# Altium PCB Drone_V2.PcbDoc
Units mm, origin at the board's own origin, x right, y up, seen from the top; angles counter-clockwise.
Board outline 72 x 72 mm, 2 copper layers (Top Layer, Bottom Layer); 31 components, 23 nets, 117 pads, 0 vias.
Unrouted connection lines stored in the file: 66.
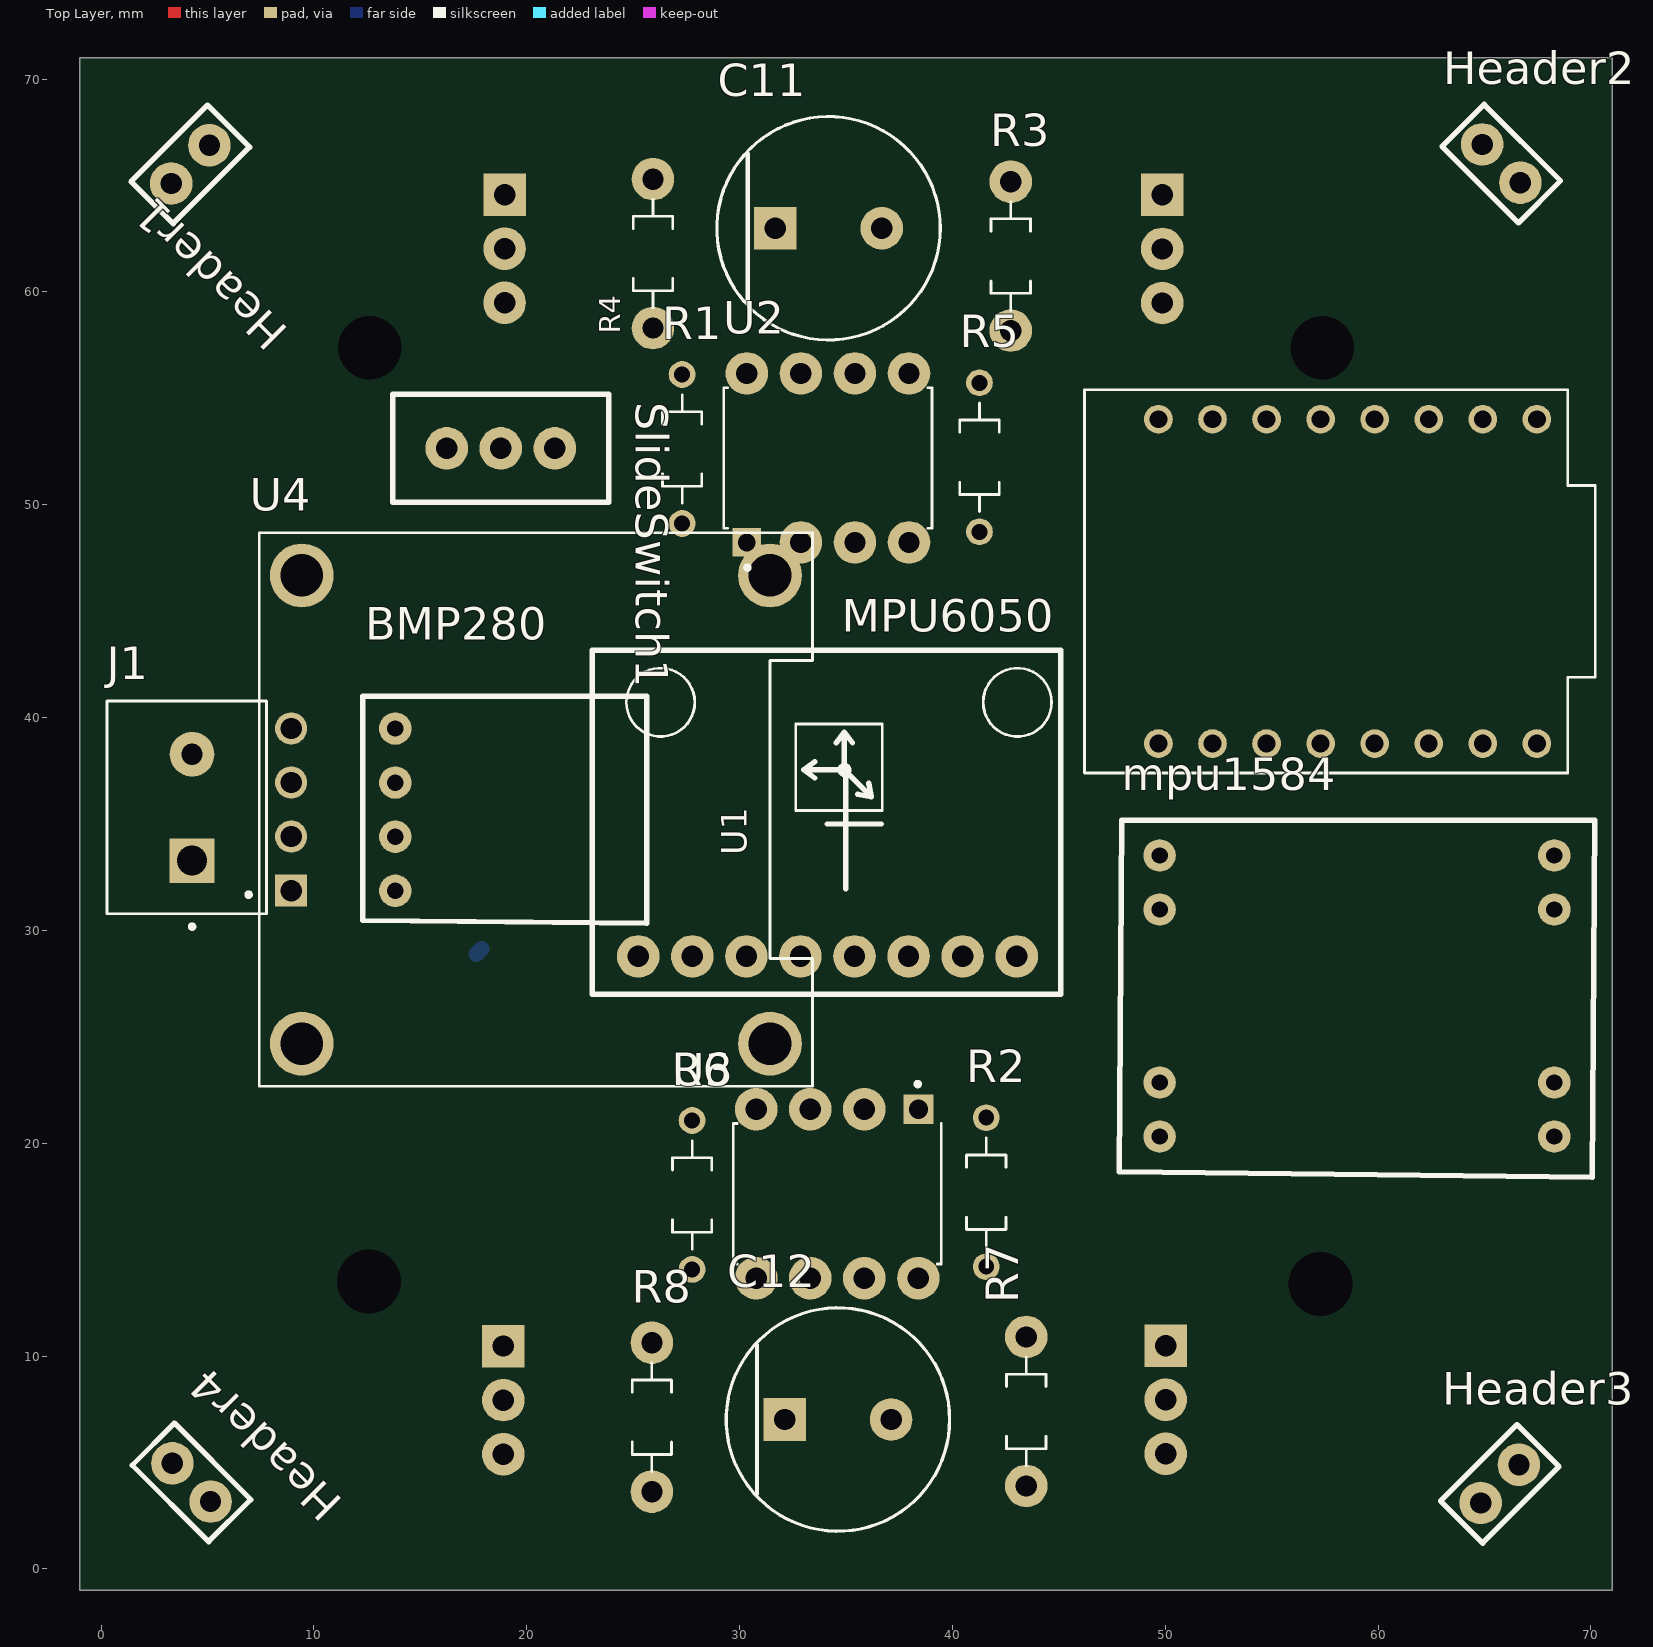
[diagram p0: Top Layer view]
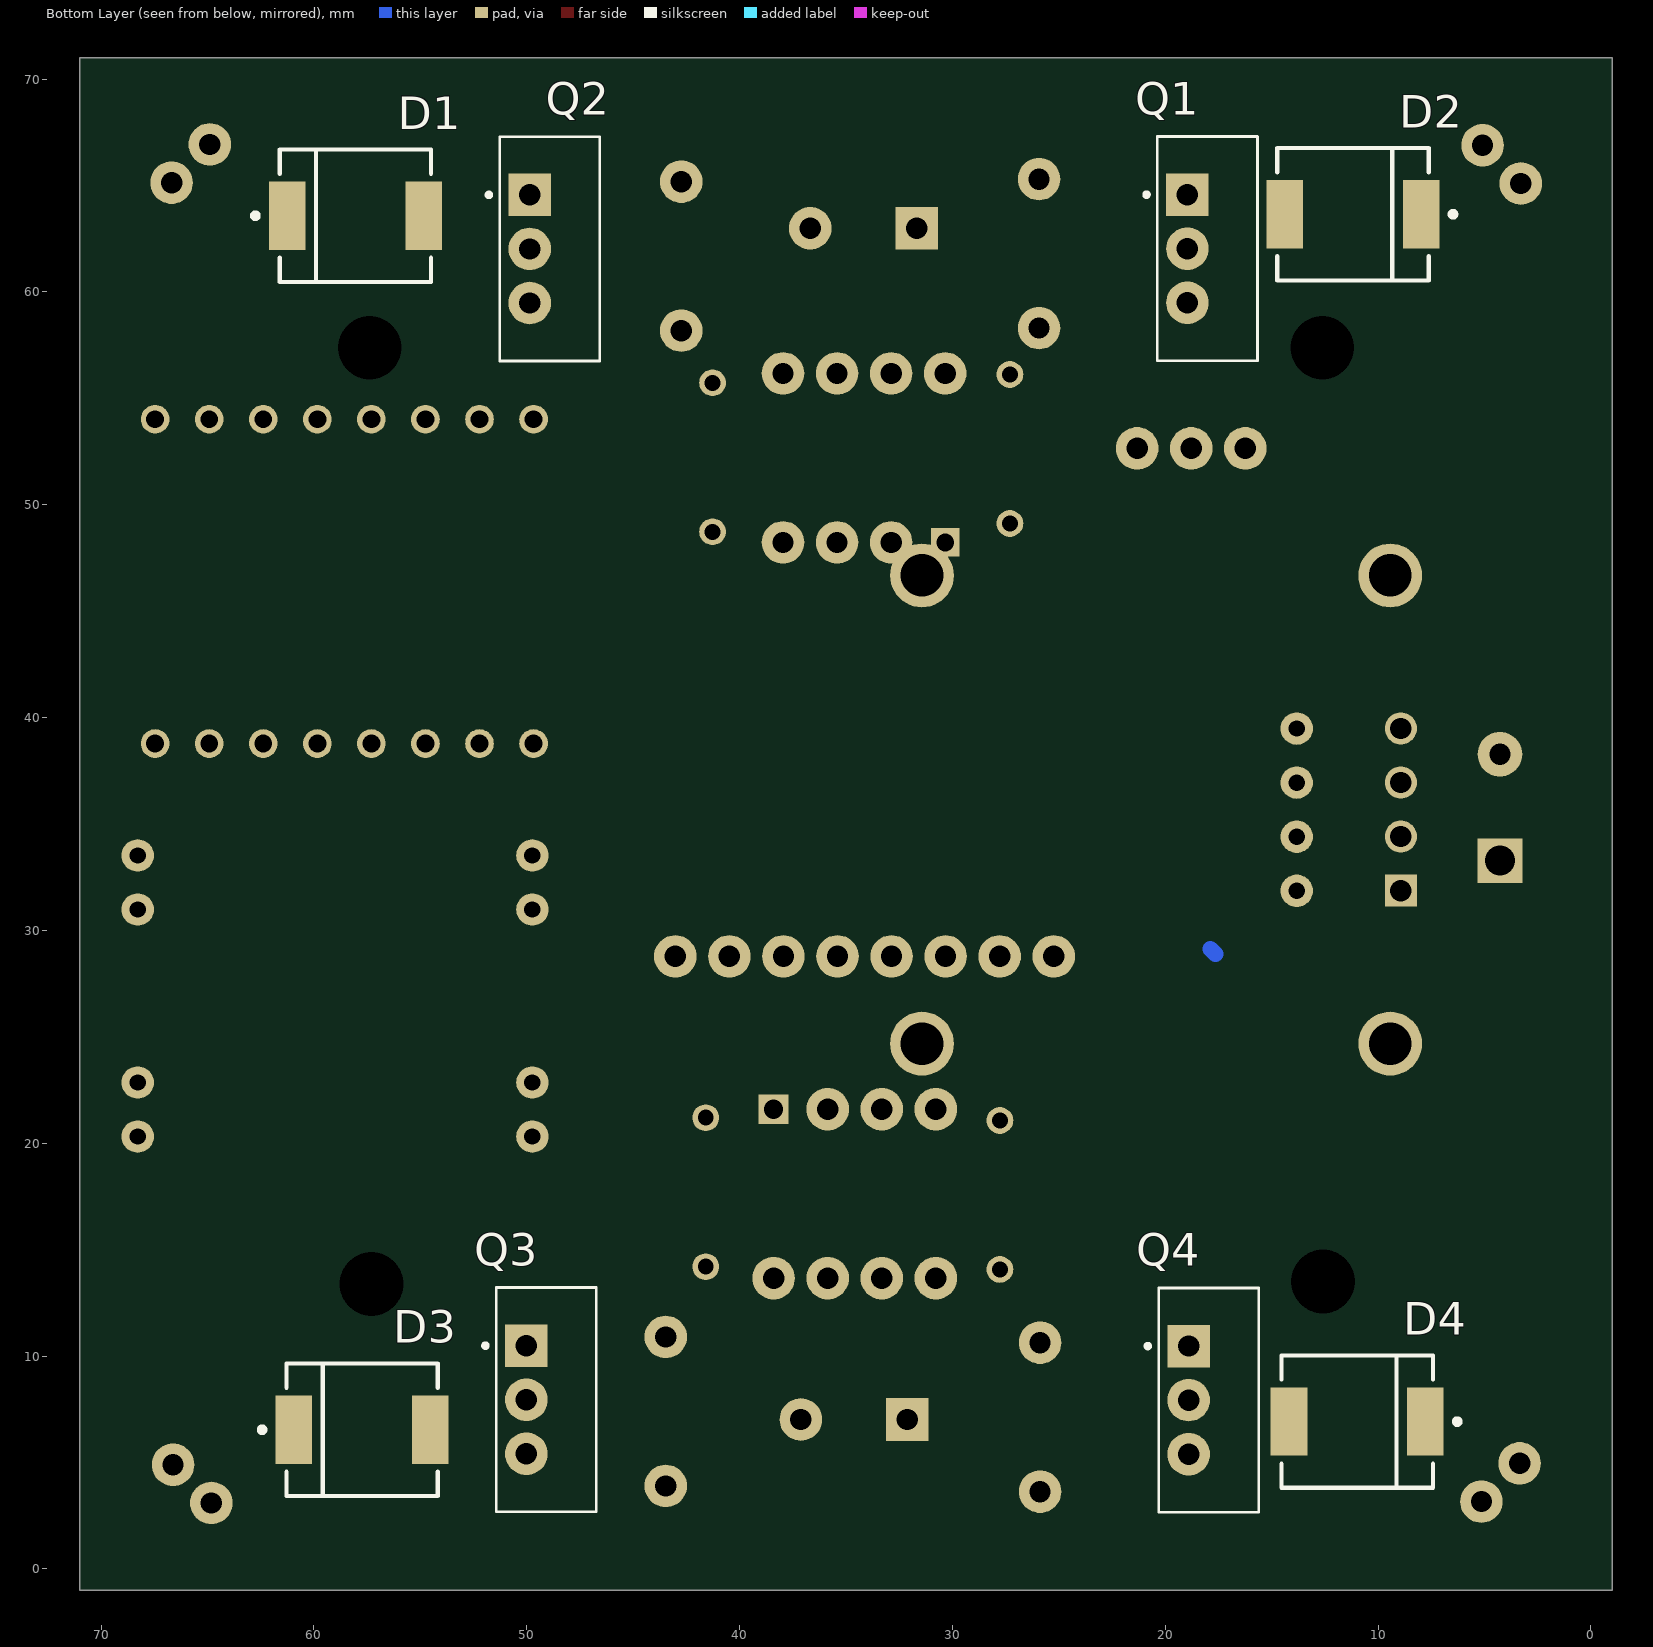
[diagram p1: Bottom Layer view, seen from below]

## Layer stack, top to bottom
Top Solder: solder mask 0.0102, Solder Resist, Dk 3.5
Top Layer: signal copper 0.0356
Dielectric 1: dielectric 0.32, FR-4, Dk 4.8
Bottom Layer: signal copper 0.0356
Bottom Solder: solder mask 0.0102, Solder Resist, Dk 3.5

## Board outline
-1,-1 -1,71 71,71 71,-1

## Design rules (kind name [scope] priority, off if disabled: settings)
BoardOutlineClearance [IsPolygon] p1: gap=0.5 ignorepadtopadclearanceinfootprint=FALSE
Clearance Clearance_1 [InPolygon] p1: gap=1.5 ignorepadtopadclearanceinfootprint=FALSE
Clearance [All] p2: gap=0.5 ignorepadtopadclearanceinfootprint=FALSE
PolygonConnect [All] p1: connectstyle=Relief reliefconductorwidth=0.254 reliefentries=4 polygonreliefangle="90 Angle" airgapwidth=0.254
RoutingLayers [All] p1: top layer_v5=FALSE bottom layer_v5=TRUE
RoutingVias [All] p1: holewidth=0.711 width=1.27 viastyle="Through Hole" minholewidth=0.711 minwidth=1.27 maxholewidth=0.711 maxwidth=1.27
SolderMaskExpansion [All] p1: expansion=0.102 istentingtop=FALSE
SupplyNets "Schematic Supply Nets_2" [InNet('+5')] p1: voltage=0.000
SupplyNets "Schematic Supply Nets_3" [InNet('VCC')] p2: voltage=0.000
SupplyNets "Schematic Supply Nets_1" [InNet('GND')] p3: voltage=0.000
SupplyNets "Schematic Supply Nets" [InNet('+3.3V')] p4: voltage=0.000
Width Width_Power [InNet('VCC') or InNet('NetD4_2') or InNet('NetD1_2') or InNet('NetD3_2') or InNet('NetD2_2')] p1: maxlimit=2 minlimit=0.75 preferedwidth=2
Width Width_GND [InNet('GND')] p2: maxlimit=1.5 minlimit=0.75 preferedwidth=1.5
Width Width_1 [All] p3: maxlimit=0.75 minlimit=0.75 preferedwidth=0.75
29 further rules are at their usual default settings.

## Components (designator, comment, footprint, x,y, rotation, side; value= is the part's Value field where it differs from the comment)
BMP280 "Component_1" PCBComponent_1#1 14.33,36.18 r0 top
C11 "25SEK470M" FP-OS-CON-TH-F13-d_0_6-MFG 34.18,62.99 r0 top
C12 "25SEK470M" FP-OS-CON-TH-F13-d_0_6-MFG 34.62,7.02 r0 top
D1 "SS34-E3/57T" FP-95402-MFG 58.05,63.58 r180 bottom
D2 "SS34-E3/57T" FP-95402-MFG 11.18,63.65 r0 bottom
D3 "SS34-E3/57T" FP-95402-MFG 57.735,6.54 r180 bottom
D4 "SS34-E3/57T" FP-95402-MFG 10.98,6.92 r0 bottom
Header1 "Component_1" 1X2P 5.719,67.339 r135 top
Header2 "Component_1" 1X2P 64.441,67.559 r225 top
Header3 "Component_1" 1X2P 64.191,2.651 r315 top
Header4 "Component_1" 1X2P 5.595,2.535 r45 top
J1 "KF301-2P" HANDSON_KF301-2P 4.275,35.78 r90 top
mpu1584 "Component_1" PCBComponent_1#2 52.15,30.22 r0 top
MPU6050 "GY-521" *GY-521_GY-521(Primary) 45.084,27.01 r90 top
Q1 "IRLZ44N" TO254P1054X469X1930-3 18.02,62.031 r270 bottom
Q2 "IRLZ44N" TO254P1054X469X1930-3 48.92,62.02 r270 bottom
Q3 "IRLZ44N" TO254P1054X469X1930-3 49.08,7.95 r270 bottom
Q4 "IRLZ44N" TO254P1054X469X1930-3 17.96,7.93 r270 bottom
R1 "3-1623927-1" RESAD700W45L350D185#1 27.3,52.62 r90 top
R2 "3-1623927-1" RESAD700W45L350D185#1 41.59,17.7 r90 top
R3 "3-1623927-1" RESAD700W45L350D185#2 42.74,61.681 r270 top
R4 "3-1623927-1" RESAD700W45L350D185#2 25.93,61.8 r90 top
R5 "3-1623927-1" RESAD700W45L350D185#1 41.27,52.23 r90 top
R6 "3-1623927-1" RESAD700W45L350D185#1 27.77,17.57 r90 top
R7 "3-1623927-1" RESAD700W45L350D185#2 43.47,7.4 r270 top
R8 "3-1623927-1" RESAD700W45L350D185#2 25.88,7.13 r270 top
SlideSwitch1 "SlideSwitch" PCBComponent_1#3 13.7,55.19 r270 top
U1 "ESP32-C3_SUPERMINI_TH" MODULE_ESP32-C3_SUPERMINI_TH 57.56,46.4 r270 top
U2 "TC4427CPA" DIP794W46P254L978H432Q8#1 34.15,52.2 r90 top
U3 "TC4427CPA" DIP794W46P254L978H432Q8#2 34.59,17.63 r270 top
U4 "DM-OLED096-636" MODULE_DM-OLED096-636 20.43,35.68 r90 top

## Footprints (in the part's own frame and the unit in brackets; to place one, negate y for a bottom-side part, rotate by r counter-clockwise, add the part's x,y. Pads: shape width x height; smd on the part's side, far side on the other; paste and mask are expansions set on the pad)
1X2P [mm]
  round 2 hole 1: 1(0.127,3.302) 2(0.127,0.762)
  silkscreen extent -1.27,-0.51 1.52,4.57
*GY-521_GY-521(Primary) [mm]
  round 2 hole 1: AD0(1.77,4.604) GND(1.77,17.304) INT(1.77,2.064) SCL(1.77,14.764) SDA(1.77,12.224) VCC(1.77,19.844) XCL(1.77,7.144) XDA(1.77,9.684)
  silkscreen extent 0,0 16.15,22, body extent 0.28,0.81 15.98,21.11, height 3
DIP794W46P254L978H432Q8#1 [mm]
  rect 1.338x1.338 / inner round 1.338 / far side rect 1.338x1.338 hole 0.83: 1(-3.97,3.81)
  round 2 hole 1: 2(-3.97,1.27) 3(-3.97,-1.27) 4(-3.97,-3.81) 5(3.97,-3.81) 6(3.97,-1.27) 7(3.97,1.27) 8(3.97,3.81)
  silkscreen extent -5.25,-4.89 3.3,4.89, body extent -4.19,-4.89 4.19,4.89, height 4.32
DIP794W46P254L978H432Q8#2 [mm]
  rect 1.4x1.4 hole 0.9: 1(-3.97,3.81)
  round 2 hole 1: 2(-3.97,1.27) 3(-3.97,-1.27) 4(-3.97,-3.81) 5(3.97,-3.81) 6(3.97,-1.27) 7(3.97,1.27) 8(3.97,3.81)
  silkscreen extent -5.25,-4.89 3.3,4.89, body extent -4.19,-4.89 4.19,4.89, height 4.32
FP-95402-MFG [mm]
  rect 1.72x3.2 smd paste+0: 1(-3.205,0) 2(3.205,0)
  silkscreen extent -4.83,-3.11 3.56,3.11, body extent -3.97,-2.95 3.97,2.95, height 2.62
FP-OS-CON-TH-F13-d_0_6-MFG [mm]
  rect 2x2 hole 1 paste-2539.97: 1(-2.5,0)
  round 2 hole 1 paste-2539.97 mask+0: 2(2.5,0)
  silkscreen extent -5.25,-5.25 5.25,5.25, body extent -5.35,-5.35 5.35,5.35, height 0.25
HANDSON_KF301-2P [mm]
  rect 2.1x2.1 hole 1.4: 1(-2.5,0)
  round 2.1 hole 1: 2(2.5,0)
  silkscreen extent -5.7,-3.5 5,4, body extent -5.6,-3.75 5,3.75, height 10
MODULE_DM-OLED096-636 [mm]
  rect 1.508x1.508 / inner round 1.508 / far side rect 1.508x1.508 hole 1: 1(-3.81,11.5)
  round 1.508 hole 1: 2(-1.27,11.5) 3(1.27,11.5) 4(3.81,11.5)
  round 3 hole 2: S1(-11,11) S2(11,11) S3(11,-11) S4(-11,-11)
  silkscreen extent -13,-13 13,13.6, body extent -13,-13 13,13, height 5.66
MODULE_ESP32-C3_SUPERMINI_TH [mm]
  round 1.348 hole 0.84: 0(7.62,-7.88) 1(7.62,-5.34) 2(7.62,-2.8) 3(7.62,-0.26) 3.3(7.62,4.82) 4(7.62,2.28) 5(-7.62,9.9) 5V(7.62,9.9) 6(-7.62,7.36) 7(-7.62,4.82) 8(-7.62,2.28) 9(-7.62,-0.26) 10(-7.62,-2.8) 20(-7.62,-5.34) 21(-7.62,-7.88) G(7.62,7.36)
  silkscreen extent -9,-11.35 9,12.65, body extent -9,-11.35 9,12.65, height 4.16
PCBComponent_1#1 [mil]
  round 60 hole 30: 1(-20,130) 2(-20,30) 3(-20,-70) 4(-20,-170)
  silkscreen extent -80,-230 445,190
PCBComponent_1#2 [mil]
  round 60 hole 30: 1(-95,130) 2(-95,30) 3(-95,-290) 4(-95,-390) 5(635,130) 6(635,30) 7(635,-290) 8(635,-390)
  silkscreen extent -170,-465 710,195
PCBComponent_1#3 [mil]
  round 78.74 hole 39.37: 0(100,300) 1(100,200) 2(100,100)
  silkscreen extent 0,0 200,400
RESAD700W45L350D185#1 [mm]
  round 1.258 hole 0.75: 1(-3.5,0) 2(3.5,0)
  silkscreen extent -2.55,-0.92 2.55,0.92, body extent -3.72,-0.92 3.72,0.92, height 1.84
RESAD700W45L350D185#2 [mm]
  round 2 hole 1: 1(-3.5,0) 2(3.5,0)
  silkscreen extent -2.55,-0.93 2.55,0.93, body extent -3.72,-0.92 3.72,0.92, height 1.84
TO254P1054X469X1930-3 [mm]
  rect 2x2 hole 1: 1(-2.54,-0.94)
  round 2 hole 1: 2(0,-0.94) 3(2.54,-0.94)
  silkscreen extent -5.27,-2.96 5.27,2.35, body extent -5.03,-3.66 5.13,0.79, height 10.39

## Part data
C11 C12: library part CMP-05428-000411-1, "Conductive Polymer Aluminum Solid Capacitors (OS-CON) 470uF ±20% 25V RADIAL TH 10x13mm", RoHS Compliant=Yes
D1 D2 D3 D4: library part CMP-02539-000012-1, "DIODE SCHOTTKY 40V 3A DO214AB", Forward Current=3A, Manufacturer=Vishay, Max Junction Temp=+150°C, Max Repetitive Reverse Voltage=40V, Max Surge Forward Current=100A, Package=95402, Peak Reverse Current=0.5mA, Temperature="-55°C to +150°C", Temperature Range Low=-55°C, Automotive=No, Category=Diode, ComponentLink2Description=Datasheet, ComponentLink2URL=http://www.vishay.com/docs/88751/ss32.pdf, Device Class L1="Discrete Semiconductors", Device Class L2=Diodes, Device Class L3="Schottky Diodes", Digikey Description="DIODE SCHOTTKY 40V 3A DO214AB", Footprint Url=http://www.vishay.com/docs/95402/smc.pdf, Height=2.62mm, Lead Free=Yes, Manufacturer Part Number=SS34-E3/57T, Mouser Description="Schottky Diodes & Rectifiers 3.0 Amp 40 Volt", Octopart=https://octopart.com/ss34-e3%2F57t-vishay-39552907, RoHS=TRUE, Standoff Height=0mm, Temperature Range High=+150°C
J1: "2 Pin Terminal Block 5mm Pitch", Package=None, Check_prices=https://www.snapeda.com/parts/KF301-2P/Handson+Technology/view-part/?ref=eda, MF="Handson Technology", MP=KF301-2P, SnapEDA_Link=https://www.snapeda.com/parts/KF301-2P/Handson+Technology/view-part/?ref=snap
MPU6050: "Triple Axis Accelerometer Gyro Breakout", Package=Package, Check_prices=https://www.snapeda.com/parts/GY-521/GODREAM+FORDREAM+CO.%252C+LIMITED/view-part/?ref=eda, MF="GODREAM FORDREAM CO., LIMITED", MP=GY-521, SnapEDA_Link=https://www.snapeda.com/parts/GY-521/GODREAM+FORDREAM+CO.%252C+LIMITED/view-part/?ref=snap
Q1 Q2 Q3 Q4: "N-Channel 55 V 47A (Tc) 3.8W (Ta), 110W (Tc) Surface Mount D2PAK", Package="TO-220-3 Infineon / IR", Availability="Not in stock", Check_prices=https://www.snapeda.com/parts/IRLZ44N/Infineon/view-part/?ref=eda, MF="Infineon / IR", MP=IRLZ44N, Price=None, SnapEDA_Link=https://www.snapeda.com/parts/IRLZ44N/Infineon/view-part/?ref=snap
R1 R2 R3 R4 R5 R6 R7 R8: "1 MOhms Â±5% 0.25W, 1/4W Through Hole Resistor Axial - Carbon Film", Package=None, Check_prices=https://www.snapeda.com/parts/3-1623927-1/TE+Connectivity/view-part/?ref=eda, MF="TE Connectivity", MP=3-1623927-1, SnapEDA_Link=https://www.snapeda.com/parts/3-1623927-1/TE+Connectivity/view-part/?ref=snap
U1: "Super tiny ESP32-C3 board", Package=Package, Check_prices=https://www.snapeda.com/parts/ESP32-C3%20SuperMini_TH/Espressif+Systems/view-part/?ref=eda, MF="Espressif Systems", MP="ESP32-C3 SuperMini_TH", SnapEDA_Link=https://www.snapeda.com/parts/ESP32-C3%20SuperMini_TH/Espressif+Systems/view-part/?ref=snap
U2 U3: "TC4427CPA,Dual MOSFET Power Driver 1.5A,4.5 to 18V,Non-Inverting,8-Pin PDIP", Package="DIP-8 Microchip", Check_prices=https://www.snapeda.com/parts/TC4427CPA/Microchip+Technology/view-part/?ref=eda, MF="Microchip Technology", MP=TC4427CPA, SnapEDA_Link=https://www.snapeda.com/parts/TC4427CPA/Microchip+Technology/view-part/?ref=snap
U4: "0.96â€ 128 X 64 MONOCHROME GRAPHIC OLED DISPLAY MODULE - I2C", Package=Package, Check_prices=https://www.snapeda.com/parts/DM-OLED096-636/Display+Module/view-part/?ref=eda, MF="Display Module", MP=DM-OLED096-636, SnapEDA_Link=https://www.snapeda.com/parts/DM-OLED096-636/Display+Module/view-part/?ref=snap

## Free pads (board coordinates)
  round 0 hole 3: 42(12.62,57.38) 46(57.38,57.38) 47(57.3,13.38) 48(12.58,13.5)

## Nets (pads, with @x,y where several pads share a name; then routed paths per layer and width w, separated by ;. In a path a pad name is that pad's centre, name@x,y a point inside that pad or via, vN(x,y) a via of type N, cw(c..) or ccw(c..) an arc to the next point about the centre after c; other vN are vias at no path point)
+3.3V: BMP280.1 MPU6050.VCC U1.3.3 U4.2
+5: SlideSwitch1.0 U1.5V
A0: R1.2 U1.0 U2.2
A1: R2.1 U1.1 U2.4
A2: R5.2 U1.4 U3.4
A3: R6.1 U1.5 U3.2
GND: BMP280.2 C11.1 C12.1 J1.2 mpu1584.1 mpu1584.5 MPU6050.GND Q1.3 Q2.3 Q3.3 Q4.3 R1.1 R2.2 R5.1 R6.2 U1.G U2.3 U3.3 U4.1
NetD1_2: D1.2 Header2.2 Q2.2
NetD2_2: D2.2 Header1.2 Q1.2
NetD3_2: D3.2 Header3.2 Q3.2
NetD4_2: D4.2 Header4.2 Q4.2
Netmpu1584_4: mpu1584.4 SlideSwitch1.1
NetQ1_1: Q1.1 R4.1
NetQ2_1: Q2.1 R3.1
NetQ3_1: Q3.1 R7.1
NetQ4_1: Q4.1 R8.1
Q1: R4.2 U2.7
Q2: R3.2 U2.5
Q3: R8.2 U3.5
Q4: R7.2 U3.7
SCL: BMP280.3 MPU6050.SCL U1.2 U4.3
SDA: BMP280.4 MPU6050.SDA U1.3 U4.4
VCC: C11.2 C12.2 D1.1 D2.1 D3.1 D4.1 Header1.1 Header2.1 Header3.1 Header4.1 J1.1 mpu1584.8 U2.6 U3.6
pads on no net: mpu1584.2 mpu1584.3 mpu1584.6 mpu1584.7 MPU6050.AD0 MPU6050.INT MPU6050.XCL MPU6050.XDA SlideSwitch1.2 U1.6 U1.7 U1.8 U1.9 U1.10 U1.20 U1.21 U2.1 U2.8 U3.1 U3.8 U4.S1 U4.S2 U4.S3 U4.S4
copper on no net: | length 0.3
  Bottom Layer w0.75: 17.647,28.895 17.886,29.134

## Other copper
Bottom Layer:
  text "GND_L02_P000" at 116.214,60.164 h1.52

## Silkscreen, mask and mechanical layers (free items; w line width, h text height)
Top Overlay:
  lines w0.254: 34.12,35 36.66,35 ; 34.98,31.96 34.99,37.48
Mechanical 1:
  the board outline again, w0.254